# Altium PCB PCB1.PcbDoc (part 2 of 2)
Units mil, origin at the board's own origin, x right, y up, seen from the top; angles counter-clockwise.
Board outline 3937.01 x 3937.01 mil, 2 copper layers (Top Layer, Bottom Layer); 170 components, 123 nets, 575 pads, 355 vias.
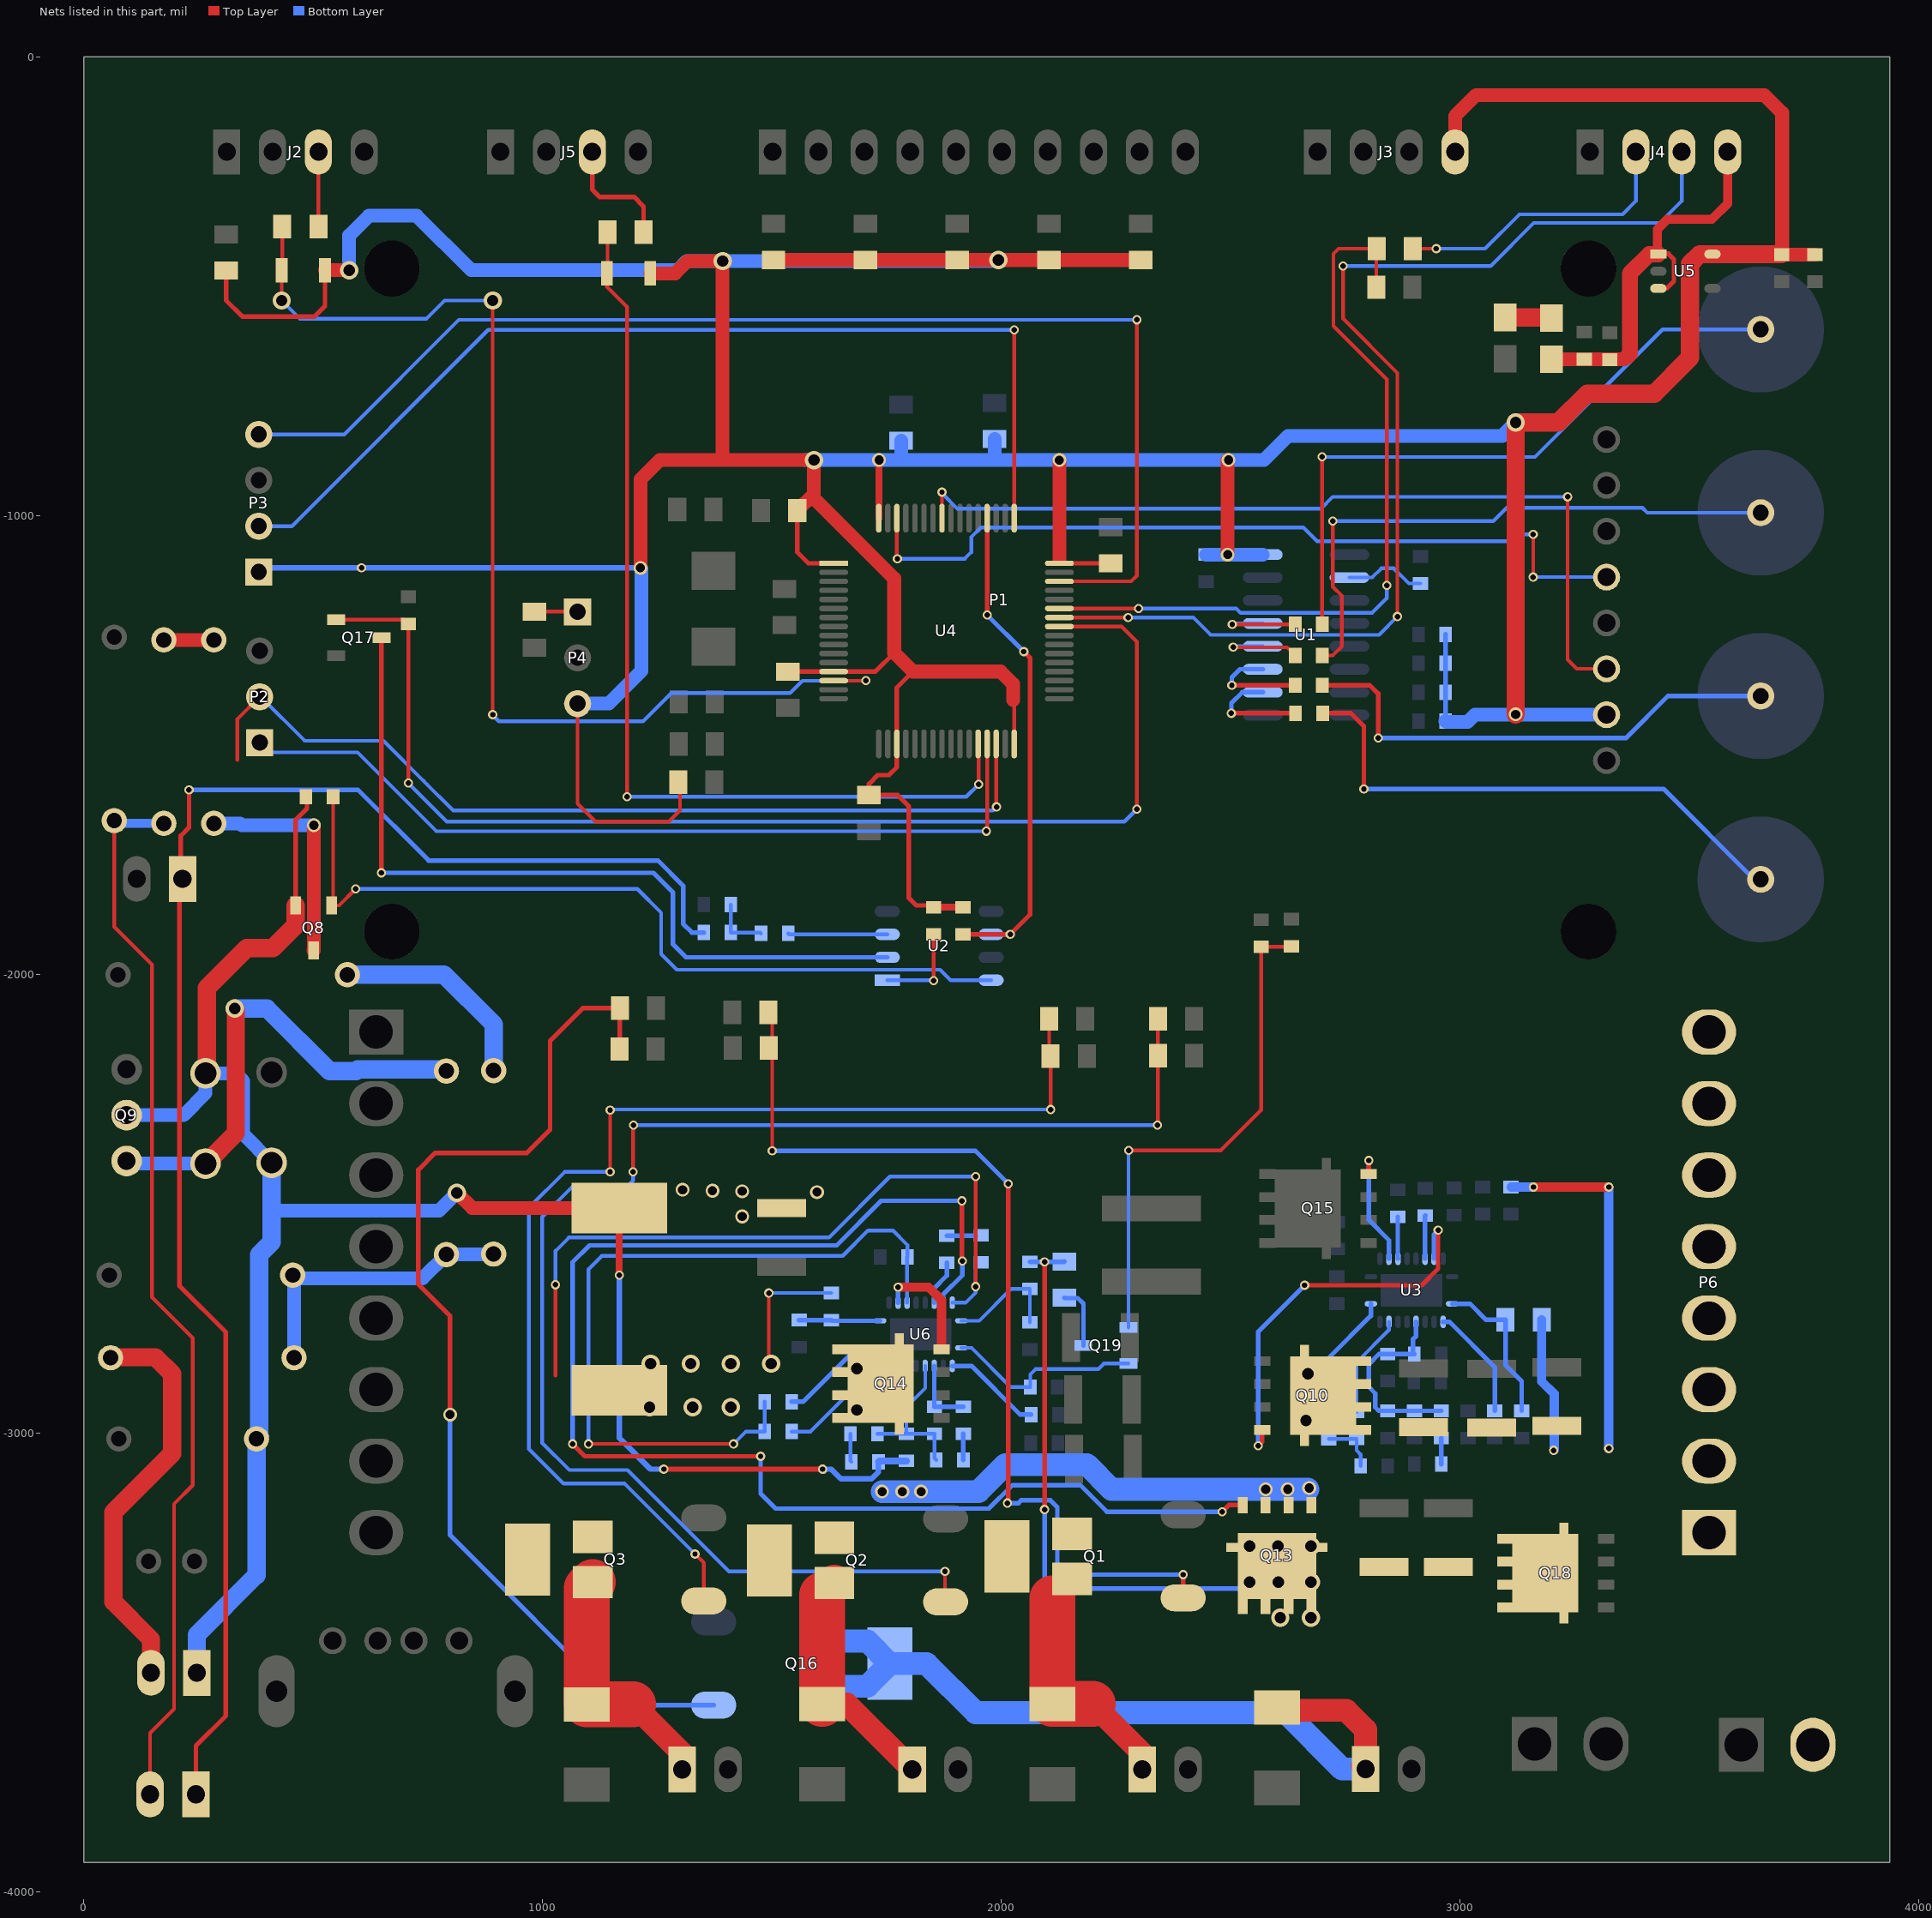
[diagram p2: the nets of this part, all layers, seen from the top]

## Via types
v1: diameter 30, hole 20, Top Layer to Bottom Layer, tented both sides, 158 vias
v2: diameter 20, hole 12, Top Layer to Bottom Layer, tented both sides, 143 vias
v3: diameter 40, hole 25, Top Layer to Bottom Layer, tented both sides, 54 vias

## Nets (pads, with @x,y where several pads share a name; then routed paths per layer and width w, separated by ;. In a path a pad name is that pad's centre, name@x,y a point inside that pad or via, vN(x,y) a via of type N, cw(c..) or ccw(c..) an arc to the next point about the centre after c; other vN are vias at no path point) (continued)
NetC23_1: C23.1 C46.1 R60.1 R61.1 | length 655.2
  Top Layer w30: C46.1@455.77,-2656 C46.1@462.69,-2662.91 ; R61.1@790.77,-2611 R61.1@791.77,-2610
  Bottom Layer w30: C23.1@455.77,-2833 C23.1@458.77,-2836 C46.1@458.77,-2659 ; C46.1@455.77,-2656 C46.1@458.77,-2659 ; R60.1@893.77,-2610 892.77,-2611 R61.1@790.77,-2611 738.86,-2662.91 462.69,-2662.91 C46.1@458.77,-2659
NetC23_2: C23.2 HUMID2.2 | length 888.3
  Top Layer w40: C23.2@58.77,-2836 59.77,-2835 156.77,-2835 192.77,-2871 192.77,-3045 64.77,-3173 64.77,-3368 146.77,-3450 HUMID2.2@146.77,-3523
NetC24_2: C24.2 Q9.1 R61.2 | length 1057.7
  Top Layer w40: C24.2@265.77,-2412.85 331.77,-2346.85 v3@331.77,-2077
  Bottom Layer w30: Q9.1@93.77,-2407 99.62,-2412.85 C24.2@265.77,-2412.85
  Bottom Layer w40: v3(329.77,-2075) 353,-2075 378.77,-2075 400,-2075 536,-2211 593.89,-2211 597.21,-2207.68 787.45,-2207.68 R61.2@790.77,-2211
NetC32_2: C32.2 C33.1 R29.1 R45.1 R48.2 U3.5 | length 429.2
  Bottom Layer w10: U3.5@2904.61,-2757.9 2904.61,-2789.16 2897.77,-2796 2897.77,-2825.06 C32.2@2900.72,-2828 R29.1@2842.77,-2828 2823.77,-2828 2801.77,-2850 2801.77,-2900 2815.77,-2914 2815.77,-2944 2823.77,-2952 2842.84,-2952 R45.1@2842.9,-2951.94 R48.2@2901.27,-2951.94 C33.1@2959.65,-2951.94
NetC33_2: C33.2 R49.2 | length 57.1
  Bottom Layer w10: C33.2@2959.65,-3011 2959.83,-3011.18 R49.2@2959.83,-3068
NetC34_1: C34.1 R42.2 R73.2 | length 122.9
  Bottom Layer w8: R42.2@2714.77,-3013.06 R73.2@2775,-3013.06 2775,-3038 2784,-3047 C34.1@2784,-3072
NetC35_2: C35.2 U1.2 | length 176.5
  Bottom Layer w8: U1.2@2759.49,-1135 2809,-1135 2829,-1115 2856,-1115 2889.06,-1148.06 C35.2@2914,-1148.06
NetC38_1: C38.1 R35.1 | length 63
  Bottom Layer w10: R35.1@1881.77,-2570 C38.1@1944.77,-2570
NetC38_2: C38.2 L5.1 Q13.1 Q13.2 Q13.3 Q14.5 Q14.6 Q14.7 Q14.8 R38.1 U6.19 | length 2865.1
  Top Layer w8: 1028.77,-2875 v2(1028.77,-2677) ; 1493.77,-2829 v2(1493.77,-2695) ; v2(1944.77,-2681) v2(1944.77,-2441)
  Bottom Layer w8: v2(1028.77,-2677) 1028.77,-2603 1057.77,-2574 1624.77,-2574 1757.77,-2441 v2(1944.77,-2441) ; v2(1493.77,-2695) R38.1@1629.77,-2695 ; U6.19@1893.67,-2716.1 1922.67,-2716.1 1944.77,-2694 v2(1944.77,-2681) C38.2@1944.77,-2629.06
  Bottom Layer w50: v1(1740.77,-3128) v1(1784.77,-3128) v1(1825.77,-3128) 1950.77,-3128 2009.77,-3069 2186.77,-3069 2240.77,-3123 v1(2576.77,-3123) v1(2624.77,-3123) v1@2668.77,-3123
  other v1: 2671.77,-3120
  other v3: 1685.77,-2950 1233.77,-2944 1327.77,-2944 1410.77,-2944 1685.77,-2860 1235.77,-2849 1323.44,-2849 1411.11,-2849 1498.77,-2849
NetC39_2: C39.2 R37.2 U6.20 | length 251.1
  Bottom Layer w8: U6.20@1913.35,-2755.47 1952.3,-2755.47 2021.72,-2686.06 R37.2@2062.77,-2686.06 C39.2@2062.77,-2758.94
NetC40_2: C40.2 R38.2 U6.11 | length 177.1
  Bottom Layer w10: C40.2@1559.77,-2753.94 1559.88,-2754.06 R38.2@1629.77,-2754.06 1631.19,-2755.47 U6.11@1736.19,-2755.47
NetC51_1: C51.1 C52.1 U6.4 | length 152.3
  Bottom Layer w10: U6.4@1854.3,-2853.9 1854.3,-2942.47 C52.1@1854.77,-2942.94 1917.72,-2942.94 C51.1@1917.77,-2943
NetC51_2: C51.2 R41.2 | length 56.9
  Bottom Layer w10: C51.2@1917.77,-3002.06 1917.77,-3058.89 R41.2@1917.83,-3058.94
NetC52_2: C52.2 C53.1 R41.1 R43.1 R44.2 U6.5 | length 347.6
  Bottom Layer w8: C53.1@1730.77,-3001.94 1730.83,-3001.89 R44.2@1793.77,-3001.89 ; U6.5@1834.61,-2853.9 1834.61,-2902.1 R43.1@1793.77,-2942.94 R44.2@1793.77,-3001.89 ; R41.1@1858.77,-3058.94 1854.77,-3054.94 C52.2@1854.77,-3002 1854.66,-3001.89 R44.2@1793.77,-3001.89
NetC53_2: C53.2 R46.2 | length 61.8
  Bottom Layer w8: C53.2@1671.72,-3001.94 1671.72,-3060.94 R46.2@1673.72,-3062.94
NetFB1_2: FB1.2 FU2.1 | length 101.4
  Top Layer w40: FB1.2@3099,-568 3199,-568 FU2.1@3200,-569
NetHUMID1_1: HUMID1.1 HUMID3.1 R57.2 | length 3570.4
  Top Layer w10: v2(229.77,-1598) 229.77,-1680 211.77,-1698 211.77,-1788 HUMID3.1@215.77,-1792 208.77,-1799 208.77,-2679 309.77,-2780 309.77,-3617 244.77,-3682 HUMID1.1@244.77,-3788
  Bottom Layer w10: v2(229.77,-1598) 598,-1598 752,-1752 1252,-1752 1307,-1807 1307,-1890 1326,-1909 R57.2@1351.94,-1909
NetHUMID1_2: HUMID1.2 R25.2 R26.2 | length 2343
  Top Layer w8: R26.2@66.77,-1665 66.77,-1896.77 149,-1979 149,-2704 238,-2793 238,-3114 197,-3155 197,-3602 144.77,-3654.23 HUMID1.2@144.77,-3788
  Bottom Layer w8: R26.2@66.77,-1665 R26.2@72.77,-1671
  Bottom Layer w20: R26.2@72.77,-1671 R25.2@174.77,-1671
NetJ2_3: J2.3 R2.1 | length 163
  Top Layer w8: R2.1@511.77,-370 J2.3@511.77,-207
NetJ5_3: J5.3 R4.1 | length 272.4
  Top Layer w8: R4.1@1215.77,-377 R4.1@1220.77,-382
  Top Layer w10: J5.3@1108.77,-207 1108.77,-289 1124.77,-305 1199.77,-305 1220.77,-326 R4.1@1220.77,-382
NetL2_1: L2.1 R60.2 | length 464.5
  Bottom Layer w40: L2.1@575,-2001 785.77,-2001 893.77,-2109 R60.2@893.77,-2210
NetP4_1: P4.1 R17.2 | length 94.3
  Top Layer w8: R17.2@982.77,-1209.26 1076.03,-1209.26 P4.1@1076.77,-1210
NetQ1_1: Q1.1 R1.2 R3.2 | length 2140.8
  Top Layer w8: R1.2@1492.51,-2067 1492.51,-2076 1501,-2084.49 1501,-2223.49 v2(1501,-2385) v2@1497.51,-2381.51
  Top Layer w10: v2@2015.77,-3151 v2(2015.77,-2457) ; Q1.1@2396.83,-3359.55 v2@2396.83,-3309.06
  Bottom Layer w10: v2(1501,-2385) 1943.77,-2385 v2(2015.77,-2457) ; v2(2013.77,-3153) 2037.77,-3153 2043.77,-3147 2107.77,-3147 2122.77,-3162 2122.77,-3286 2145.77,-3309 v2(2396.77,-3309)
NetQ2_1: Q2.1 R5.2 R6.2 | length 3282.1
  Top Layer w8: v2(1197.77,-2431) 1197.77,-2330 v2(1198.77,-2329) ; v2(1877.77,-3302) 1877.77,-3367.49 Q2.1@1878.83,-3368.55 ; v2@2342.03,-2327.97 R6.2@2342.03,-2177.74 ; R6.2@2342.03,-2177 R6.2@2342.03,-2177.74 ; R5.2@2342.03,-2097 2342.03,-2176.26 2341.29,-2177 R6.2@2342.03,-2177.74
  Bottom Layer w8: v2(1197.77,-2431) 1197.77,-2450 1183.77,-2464 1064.77,-2464 999.77,-2529 999.77,-3022 1058.77,-3081 1185.77,-3081 1406.77,-3302 v2(1877.77,-3302) ; v2(1198.77,-2329) v2(2341,-2329) v2@2342,-2328
NetQ3_1: Q3.1 R10.2 R11.2 | length 2597.5
  Top Layer w8: v2(1147.77,-2431) v2(1147.77,-2296) ; v2(1332.77,-3264) 1351.83,-3283.06 Q3.1@1351.83,-3366.55 ; R10.2@2105.03,-2097 2105.03,-2175.74 R11.2@2108.03,-2178.74 v2(2108.03,-2294.97)
  Bottom Layer w8: v2(1147.77,-2431) 1048.77,-2431 970.77,-2509 970.77,-3035 1046.25,-3110.48 1179.25,-3110.48 v2(1332.77,-3264) ; v2(1147.77,-2296) 1148.77,-2295 v2@2108,-2295
NetQ8_1: Q8.1 R63.1 U2.8 | length 1830.9
  Top Layer w8: 543.77,-1652 543.77,-1657 ; R63.1@543.77,-1613 543.77,-1657 ; v2(593,-1814) 557,-1850 Q8.1@540.77,-1850 543.77,-1847 543.77,-1657
  Bottom Layer w8: v2(593,-1814) 1207,-1814 1259,-1866 1259,-1956 1293,-1990 1867,-1990 1890,-2013 U2.8@1978.38,-2013
NetQ8_3: Q8.3 R24.2 | length 499.2
  Top Layer w30: Q8.3@501.4,-1948.43 502.03,-1947.8 502.03,-1816.26 v1(502.03,-1675.03)
  Bottom Layer w30: R24.2@287.77,-1675 R24.2@283.77,-1671 341,-1671 345.03,-1675.03 v1(502.03,-1675.03)
NetQ10_4: Q10.4 U3.18 | length 873.2
  Top Layer w10: v2(2560.77,-3028) 2569.17,-3019.6 Q10.4@2569.17,-2993.38 ; v2(2661.77,-2678) 2916.77,-2678 2952.77,-2642 v2(2952.77,-2558)
  Bottom Layer w10: v2(2560.77,-3028) 2560.77,-2779 v2(2661.77,-2678) ; U3.18@2943.98,-2620.1 2943.98,-2566.79
NetQ13_4: Q13.4 U6.18 | length 3157.9
  Top Layer w10: v2(1065.77,-3024) 1092.77,-3051 v2(1475.77,-3051) ; v2@1914.77,-2625 v2(1914.77,-2494) ; v2(2481.77,-3172) 2496.65,-3157.13 Q13.4@2526.56,-3157.13
  Bottom Layer w10: v2(1065.77,-3024) 1065.77,-2628 1102.77,-2591 1641.77,-2591 1738.77,-2494 v2(1914.77,-2494) ; v2(1475.77,-3051) 1475.77,-3132 1508.77,-3165 1973.49,-3165 2024.49,-3114 2172.77,-3114 2230.77,-3172 v2(2481.77,-3172) ; U6.18@1873.98,-2716.1 1873.98,-2697.79 1915.77,-2656 v2(1915.77,-2625)
NetQ14_4: Q14.4 U6.13 | length 247.7
  Top Layer w20: v2(1775.77,-2682) 1841.77,-2682 1870.37,-2710.6 Q14.4@1870.37,-2817.62
  Bottom Layer w10: U6.13@1775.56,-2716.1 1775.56,-2682.21 v2(1775.77,-2682)
NetQ15_4: Q15.4 U3.13 | length 262
  Top Layer w10: Q15.4@2801.37,-2435.62 2801.77,-2435.22 v2(2801.77,-2406)
  Bottom Layer w10: v2(2801.77,-2406) 2801.77,-2536 2845.56,-2579.79 U3.13@2845.56,-2620.1
NetQ16_1: Q16.1 R52.2 R53.2 | length 2342
  Top Layer w10: v1(798.77,-2960) 798.77,-2745 729.77,-2676 729.77,-2426.23 766.5,-2389.5 966.5,-2389.5 1017,-2339 1017,-2145 1088,-2074 R52.2@1169.03,-2074 1169.03,-2162 R53.2@1168.03,-2163
  Bottom Layer w10: v1(798.77,-2960) 798.77,-3223 1169.32,-3593.55 Q16.1@1373.71,-3593.55
NetQ17_3: Q17.3 U2.2 | length 1758.6
  Top Layer w10: Q17.3@648.77,-1265.94 Q17.3@649.2,-1266.37 v2(649.2,-1778.8) v2@649,-1779
  Bottom Layer w10: v2(649.2,-1778.8) 1241.8,-1778.8 1285,-1822 1285,-1935 1313,-1963 U2.2@1752,-1963
NetQ19_1: Q19.1 R71.2 R72.1 | length 1133.8
  Top Layer w8: v2(2278,-2384) 2479,-2384 2567,-2296 R71.2@2567,-1940.06 2631.94,-1940.06 R72.1@2633,-1939
  Bottom Layer w8: Q19.1@2278,-2770 v2(2278,-2384)
NetQ19_2: Q19.2 R34.2 U6.1 | length 437.5
  Bottom Layer w8: U6.1@1913.35,-2814.53 1935.53,-2814.53 2021,-2900 R34.2@2063.72,-2900 2063.72,-2872.28 2075,-2861 2212,-2861 2224.26,-2848.74 Q19.2@2278,-2848.74
NetQ19_3: Q19.3 R36.1 | length 138.2
  Bottom Layer w10: R36.1@2137.77,-2705 2138.77,-2706 2167,-2706 2179.57,-2718.57 Q19.3@2179.57,-2809.37
NetR19_2: R19.2 U3.17 | length 94.2
  Bottom Layer w10: U3.17@2924.3,-2620.1 2924.3,-2526.53 R19.2@2924.77,-2526.06
NetR20_1: R20.1 R51.2 U3.1 | length 344.1
  Bottom Layer w10: U3.1@2983.35,-2718.53 3022.3,-2718.53 3056.77,-2753 R20.1@3099.77,-2753 3099.77,-2852 3134.77,-2887 R51.2@3134.77,-2951.94
NetR23_1: R23.1 U2.1 | length 202.4
  Top Layer w8: v2(1853,-2014) R23.1@1853,-1913
  Bottom Layer w8: U2.1@1752,-2013 1852,-2013 v2(1853,-2014)
NetR24_1: R24.1 R25.1 | length 109
  Top Layer w30: R25.1@174.77,-1271 R24.1@283.77,-1271
NetR35_2: R35.2 U6.17 | length 98.4
  Bottom Layer w10: U6.17@1854.3,-2716.1 1854.3,-2684.47 1881.77,-2657 R35.2@1881.77,-2629.06
NetR39_1: R39.1 U6.10 | length 242.1
  Bottom Layer w10: R39.1@1544.77,-2932 R39.1@1543.77,-2932 1568.3,-2932 1685.77,-2814.53 U6.10@1736.19,-2814.53
NetR40_1: R40.1 U6.8 | length 304.7
  Bottom Layer w8: R40.1@1543.77,-2997 1584.77,-2997 1680.77,-2901 1751.77,-2901 1775.56,-2877.21 U6.8@1775.56,-2853.9
NetR42_1: R42.1 U3.10 | length 273.3
  Bottom Layer w10: R42.1@2714.77,-2954 2714.77,-2836 2806.19,-2744.58 U3.10@2806.19,-2718.53
NetR47_2: R47.2 U6.2 | length 216
  Bottom Layer w10: U6.2@1893.67,-2853.9 1935.67,-2853.9 2041.77,-2960 R47.2@2065.72,-2960
NetR50_2: R50.2 U3.2 | length 248.9
  Bottom Layer w10: U3.2@2963.67,-2757.9 2977.67,-2757.9 3076.4,-2856.62 R50.2@3076.4,-2951.94
NetR55_2: R55.2 R56.2 U4.43 | length 1713.5
  Top Layer w8: U4.43@2127.13,-1202.43 v2(2300,-1202.43) ; R55.2@2818.03,-502 2818.03,-419 R56.2@2819.03,-418 2735.77,-418 2724.77,-429 2724.77,-586.77 2841,-703 v2(2841,-1152)
  Bottom Layer w8: v2(2300,-1202.43) 2512.43,-1202.43 2522,-1212 2809,-1212 2841,-1180 v2(2841,-1152)
NetR57_1: R57.1 R62.2 R69.2 | length 127.8
  Bottom Layer w8: R62.2@1411.06,-1848 1411.06,-1908.94 R57.1@1411,-1909 1474.94,-1909 R69.2@1476.94,-1911
NetR65_1: R65.1 T1.1 | length 1451.3
  Top Layer w8: 2700,-919 2700,-934 ; v2(2700,-872) 2700,-934 ; R65.1@2700.43,-1237 2700,-1236.57 2700,-934
  Bottom Layer w8: v2(2700,-872) 3164,-872 3442,-594 T1.1@3656,-594
NetR65_2: R65.2 U1.13 | length 204.7
  Top Layer w8: v2(2504,-1237) R65.2@2641.38,-1237
  Bottom Layer w8: v2(2504,-1237) 2506,-1235 U1.13@2570.51,-1235
NetR66_1: R66.1 T2.1 | length 1281.6
  Top Layer w8: R66.1@2700.43,-1305 2723,-1305 2743,-1285 2743,-1175 2723,-1155 v2(2723,-1012)
  Bottom Layer w8: v2(2723,-1012) 3073,-1012 3102,-983 3398,-983 3408.67,-993.67 T2.1@3656,-993.67
NetR66_2: R66.2 U1.12 | length 208.2
  Top Layer w8: v2(2506,-1287) 2623.38,-1287 R66.2@2641.38,-1305
  Bottom Layer w8: v2(2506,-1287) 2508,-1285 U1.12@2570.51,-1285
NetR67_1: R67.1 T3.1 | length 1098
  Top Layer w10: R67.1@2700.43,-1370 2804,-1370 2822,-1388 v2(2822,-1485)
  Bottom Layer w10: v2(2822,-1485) 3362.33,-1485 3454,-1393.33 T3.1@3656,-1393.33
NetR67_2: R67.2 U1.11 | length 230.3
  Top Layer w10: v2(2503,-1370) R67.2@2641.38,-1370
  Bottom Layer w10: v2(2503,-1370) 2503,-1353 2521,-1335 U1.11@2570.51,-1335
NetR68_1: R68.1 T4.1 | length 1185.2
  Top Layer w10: R68.1@2701,-1431 2763,-1431 2791,-1459 v2(2791,-1596)
  Bottom Layer w10: v2(2791,-1596) 3444,-1596 3641,-1793 T4.1@3656,-1793
NetR68_2: R68.2 U1.10 | length 240.4
  Top Layer w10: v2(2502,-1431) R68.2@2641.94,-1431
  Bottom Layer w10: v2(2502,-1431) 2502,-1409 2526,-1385 U1.10@2570.51,-1385
NetR69_1: R69.1 U2.3 | length 216.8
  Bottom Layer w8: R69.1@1536,-1911 1538,-1913 U2.3@1752,-1913
NetR73_1: R73.1 U3.8 | length 225.3
  Bottom Layer w8: R73.1@2775,-2954 2775,-2846 2845.56,-2775.44 U3.8@2845.56,-2757.9
OUT1: D1.A J1.1 Q1.2 | length 505.1
  Top Layer w50: 2199.87,-3591 2307.77,-3698.91 J1.1@2307.77,-3733.5
  Top Layer w100: 2111.74,-3361.18 D1.A@2111.74,-3591 2199.87,-3591
OUT2: D4.A J6.1 Q2.2 | length 529.8
  Top Layer w50: D4.A@1610.26,-3591 1663.77,-3591 J6.1@1806.27,-3733.5
  Top Layer w80: Q2.2@1610.26,-3353.66 Q2.2@1636.71,-3327.21
  Top Layer w100: D4.A@1610.26,-3591 Q2.2@1610.26,-3353.66
OUT3: D5.A J7.1 Q3.2 | length 559
  Top Layer w50: 1197.87,-3592 1304.77,-3698.91 J7.1@1304.77,-3733.5
  Top Layer w100: Q3.2@1109.71,-3325.21 1096.77,-3338.15 D5.A@1096.77,-3592 1197.87,-3592
OUT4: D6.A J9.1 Q16.2 | length 1769.7
  Top Layer w50: D6.A@2601.77,-3599 2607.77,-3605 2752.77,-3605 2794.77,-3647 J9.1@2794.77,-3733 J9.1@2787.77,-3726
  Bottom Layer w50: Q16.2@1615.84,-3552.21 1708.36,-3552.21 Q16.2@1757.57,-3503 ; Q16.2@1615.83,-3453.79 1708.36,-3453.79 Q16.2@1757.57,-3503 ; J9.1@2797.77,-3730 J9.1@2794.77,-3733 2743.77,-3733 2620.77,-3610 1944.77,-3610 1837.77,-3503 Q16.2@1757.57,-3503
PWM: Q17.1 R54.2 U4.41 | length 2677
  Top Layer w8: Q17.1@550.77,-1227 R54.2@698.94,-1227 ; v2(707.77,-1583) 707.77,-1330 708,-1329.77 R54.2@708,-1236.06 ; U4.41@2127.13,-1241.8 2262.8,-1241.8 2296,-1275 v2(2296,-1640)
  Bottom Layer w8: v2(707.77,-1583) 791.77,-1667 2269,-1667 v2(2296,-1640)
RES: P1.5 U4.62 | length 1794.1
  Top Layer w8: U4.62@1772.8,-1005.57 1772.8,-1092.8 v2(1774,-1094) ; v2(3160,-1134) v2(3160,-1041)
  Bottom Layer w8: v2(1774,-1094) 1921,-1094 1935,-1080 1935,-1047 1956,-1026 2659,-1026 2689,-1056 3111,-1056 3126,-1041 v2(3160,-1041) ; v2(3160,-1134) P1.5@3320,-1134
RX: J4.2 R56.1 | length 635.2
  Top Layer w8: R56.1@2897.77,-418 v2@2947.77,-418
  Bottom Layer w8: v2(2948.77,-418) 3055,-418 3130,-343 3355,-343 3383.77,-314.23 J4.2@3383.77,-207
RX3: P2.2 U4.30 | length 2019.2
  Top Layer w8: 335.24,-1532.4 335.24,-1443.53 P2.2@383.77,-1395 ; U4.30@1989.33,-1497.7 1989.33,-1634.33 v2(1990,-1635)
  Bottom Layer w8: P2.2@383.77,-1395 386,-1395 482,-1491 653.77,-1491 741.39,-1578.61 ; 749.77,-1587 741.39,-1578.61 ; v2(1990,-1635) 1982,-1643 805.77,-1643 741.39,-1578.61
SCK: P1.3 U4.57 | length 1898.1
  Top Layer w8: U4.57@1871.22,-1005.57 v2(1871.22,-948.78) v2@1871.22,-946.78 ; v2(3235,-959) 3235,-1314 3255,-1334 P1.3@3320,-1334
  Bottom Layer w8: v2(1871.22,-948.78) 1871.22,-951.22 1905,-985 2697,-985 2723,-959 v2(3235,-959)
SW1: D2.A R2.2 U4.14 | length 2483.4
  Top Layer w8: v3(431.77,-531) D2.A@431.77,-465 433.03,-463.74 R2.2@433.03,-370 ; v2(891.77,-1434) v3(891.77,-531) ; U4.14@1635,-1359.91 v2(1705.09,-1359.91)
  Bottom Layer w8: v3(431.77,-531) 471.77,-571 747,-571 787,-531 v3(891.77,-531) ; v2@891.77,-1435 905.3,-1448.53 1219.47,-1448.53 1281,-1387 1540,-1387 1567.09,-1359.91 v2(1705.09,-1359.91)
SW2: D3.A R4.2 U4.28 | length 2115.9
  Top Layer w8: R4.2@1142.03,-382 1142.03,-470.74 D3.A@1140.77,-472 1140.77,-501 1184.77,-545 v2(1184.77,-1613) ; U4.28@1949.96,-1497.7 1951,-1498.74 v2(1951,-1586)
  Bottom Layer w8: v2(1184.77,-1613) 1712,-1613 1924,-1613 v2(1951,-1586)
SWCLK: P3.2 U4.49 | length 2235.2
  Top Layer w8: U4.49@2028.7,-1005.57 v2(2028.7,-595.3) v2@2029,-595
  Bottom Layer w8: P3.2@381.77,-1023 454,-1023 882,-595 v2@2029,-595
SWD: P3.4 U4.46 | length 2749.8
  Top Layer w8: U4.46@2127.13,-1143.37 2283.63,-1143.37 2296,-1131 v2(2296,-573)
  Bottom Layer w8: P3.4@381.77,-823 568,-823 818,-573 v2(2296,-573)
TX: J4.3 U4.42 | length 2486.2
  Top Layer w8: U4.42@2127.13,-1222.11 2276.89,-1222.11 v2(2277,-1222) ; v2(2745.77,-456) 2745.77,-570.77 2864,-689 v2(2864,-1220)
  Bottom Layer w8: v2(2277,-1222) 2419,-1222 2457,-1260 2824,-1260 v2(2864,-1220) ; v2(2745.77,-456) 3067,-456 3161,-362 3436,-362 3483.77,-314.23 J4.3@3483.77,-207
TX3: P2.1 U4.29 | length 1855.4
  Top Layer w8: v2(1968,-1688) 1970,-1686 1970,-1498.06 U4.29@1969.65,-1497.7
  Bottom Layer w8: P2.1@383.77,-1495 404.77,-1516 597,-1516 769,-1688 v2(1968,-1688)
VCC: C27.2 C28.1 FU2.2 J4.4 U5.1 U5.3 | length 888.9
  Top Layer w10: U5.3@3432.77,-504.8 3450.77,-504.8 3466.77,-488.8 3466.77,-441 3454.77,-429 U5.1@3445.21,-429
  Top Layer w20: U5.1@3432.77,-430 3430.77,-428 3430.77,-376 3452.77,-354 3549.42,-354 3583.77,-319.65 J4.4@3583.77,-207
  Top Layer w30: FU2.2@3200,-659 C28.1@3271,-659 3327,-659 3331,-659 3359,-659 3366,-652
  Top Layer w35: 3366,-652 3371,-647 3371,-472 3413,-430 U5.1@3432.77,-430
VCC_3.3V: C4.2 C5.2 C6.2 C7.2 C25.1 C26.2 C36.1 D2.K D3.K J3.4 P1.2 P3.1 P4.3 R7.2 R8.2 R9.2 R12.1 R13.1 R15.1 R16.1 R18.1 R22.2 R23.2 R28.1 R58.2 R59.1 R64.1 R70.2 U1.16 U4.1 U4.13 U4.19 U4.32 U4.48 U4.64 U5.5 | length 13578.6
  Top Layer w8: P4.3@1076.77,-1410 1076.77,-1627.77 1116,-1667 1276,-1667 1300,-1643 1300,-1585 R15.1@1296,-1581 ; 2026,-1402 2028.7,-1404.7 U4.32@2028.7,-1497.7
  Top Layer w10: R22.2@310.77,-465.74 310.77,-531 345.77,-566 503.77,-566 526.26,-543.51 D2.K@526.26,-465 ; C4.2@1535,-1340.26 1535.04,-1340.22 U4.13@1635,-1340.22 1635.31,-1339.91 1726.09,-1339.91 1767,-1299 ; C5.2@1555.74,-989 1555.74,-1079.74 1580,-1104 U4.1@1635,-1104 ; 1808,-1340 1772.48,-1375.52 1772.48,-1497.39 U4.19@1772.8,-1497.7 1772.8,-1548.46 1755.51,-1565.75 1731.25,-1565.75 1712,-1585 C6.2@1712,-1609.26 1774.26,-1609.26 1799,-1634 1799,-1834 1815,-1850 1849.06,-1850 R23.2@1853,-1853.94 ; v1@2127,-878.85 v1(2127.13,-878.98) ; 2127.13,-1095 U4.48@2127.13,-1104 2238.74,-1104 C7.2@2239,-1103.74
  Top Layer w15: U4.64@1733.43,-1005.57 1733.43,-879.42 v1(1734,-878.85) ; R23.2@1853,-1853.94 R70.2@1917,-1853.94
  Top Layer w30: D2.K@526.26,-465 v3(578.77,-465) ; v1(1213.77,-1114) 1213.77,-921.23 1256.15,-878.85 v3@1591,-878.85 ; D3.K@1235.26,-472 1289.77,-472 1316.77,-445 v3(1392.77,-445) 1392.77,-875 ; R9.2@1503.77,-442.74 R8.2@1704.02,-442.74 R7.2@1904.27,-442.74 v3(1993.77,-442.74) R59.1@2104.52,-442.74 R58.2@2304.77,-442.74 ; C5.2@1555.74,-989 1592,-952.74 ; v3(1592,-878.85) 1592,-952.74 ; 2026,-1402 2026,-1367 1999,-1340 1808,-1340 1767,-1299 1767,-1137 1592,-962 1592,-952.74 ; 2127.13,-1095 v1(2127.13,-878.98) ; v1(2494,-1085) v1@2494,-878.85 ; J3.4@2989.77,-207 2989.77,-129 3035.77,-83 3663.77,-83 3702.77,-122 3702.77,-429.94 C26.2@3701.77,-430.94 C36.1@3774,-430.94
  Top Layer w40: v1(3121.77,-1433.23) v3(3121.77,-797) 3215,-797 3278,-734 3424,-734 3502,-656 3502,-451 3523,-430 U5.5@3550.88,-430 C26.2@3700.83,-430
  Bottom Layer w10: R28.1@2969,-1448 R16.1@2969,-1385 R18.1@2969,-1322 R64.1@2969,-1259
  Bottom Layer w12: P3.1@381.77,-1123 390.77,-1114 v2(605.77,-1114) v1(1213.77,-1114) ; P4.3@1071.77,-1405 P4.3@1076.77,-1410
  Bottom Layer w30: v3(578.77,-465) 578.77,-389.23 622,-346 726,-346 845,-465 1294.77,-465 1314.77,-445 v3(1392.77,-445) v3@1977.77,-445 ; P4.3@1076.77,-1410 1144.77,-1410 1215.77,-1339 v1@1215.77,-1116 ; v3@1572.42,-878.85 v3(1592,-878.85) v1(1734,-878.85) v1(2496,-878.85) 2573,-878.85 2625.85,-826 3092.77,-826 v3(3121.77,-797) ; 1782,-875.85 R13.1@1782,-837 ; 1986,-875.85 R12.1@1986,-833 ; C25.1@2447,-1085 v1(2494,-1085) U1.16@2570.51,-1085 ; R28.1@2969,-1448 2971,-1450 3016.77,-1450 3032.77,-1434 P1.2@3320,-1434
VCC_12_24: J13.2 P6.5 P6.6 P6.7 P6.8
VCC_24V: C16.2 C17.2 C24.1 C41.1 HUMID2.1 L5.2 Q8.2 Q9.2 R44.1 R46.1 R63.2 | length 4463.7
  Top Layer w10: Q8.2@462.03,-1850 462.03,-1663.97 487,-1639 487,-1615.28 R63.2@484.72,-1613
  Top Layer w12: v2(1264.77,-3079) v2(1610.77,-3079)
  Top Layer w15: v2(1167.77,-2656) L5.2@1167.77,-2509.36
  Top Layer w30: v3(813.77,-2476.3) 846.83,-2509.36 L5.2@1167.77,-2509.36
  Top Layer w40: C24.1@265.77,-2216 268.77,-2213 268.77,-2090 ; 268.77,-2064 268.77,-2090 ; Q8.2@462.03,-1850 462.03,-1893.39 412.42,-1943 355.77,-1943 268.77,-2030 268.77,-2090
  Bottom Layer w12: v2(1167.77,-2656) 1167.77,-3011 1174.77,-3018 1180.77,-3024 1235.77,-3079 v2(1264.77,-3079) ; v2@1614.77,-3083 v2(1610.77,-3079) 1629.77,-3079 1650.77,-3100 1717.77,-3100 1732.77,-3085 R46.1@1732.77,-3062.94
  Bottom Layer w15: R46.1@1732.77,-3062.94 1734.77,-3060.94 R44.1@1793.77,-3060.94
  Bottom Layer w30: Q9.2@93.77,-2307 217.77,-2307 265.77,-2259 C24.1@265.77,-2216 ; C24.1@259.77,-2222 C24.1@265.77,-2216 ; 409.77,-2503 421.77,-2515 775.07,-2515 v3(813.77,-2476.3) ; C16.2@409.77,-2410.85 347.77,-2348.85 347.77,-2233 330.77,-2216 C24.1@265.77,-2216
  Bottom Layer w40: HUMID2.1@246.77,-3523 246.77,-3440 376.77,-3310 C17.2@376.77,-3013 C17.2@382.77,-3007 ; C17.2@383.77,-3006 C17.2@382.77,-3007 ; C16.2@409.77,-2410.85 409.77,-2503 409.77,-2584 382.77,-2611 C17.2@382.77,-3007
  other v1: 1435.77,-2528 1598.77,-2475 1435.77,-2473 1370.77,-2471.96 1305.77,-2470
VCC_L: C50.1 R39.2 R40.2 U6.14 | length 1710.4
  Top Layer w8: v2(1100.77,-3024) v2(1416.77,-3024)
  Bottom Layer w8: v2(1100.77,-3024) 1100.77,-2643 1129.77,-2614 1654.77,-2614 1709.77,-2559 1764.77,-2559 1795.77,-2590 C50.1@1795.77,-2616 ; v2(1416.77,-3024) 1443.77,-2997 R40.2@1484.72,-2997 R39.2@1484.72,-2932 ; 1794.51,-2651.73 1795.24,-2651 ; U6.14@1795.24,-2716.1 1795.24,-2651 ; C50.1@1795.24,-2616.53 1795.24,-2651
VCC_L2: C13.1 U3.14 | length 91.3
  Bottom Layer w10: C13.1@2864.77,-2529 2864.77,-2619.63 U3.14@2865.24,-2620.1
VIN: C9.1 C10.1 C11.1 C19.1 C20.1 P6.1 P6.2 P6.3 P6.4 Q10.5 Q10.6 Q10.7 Q10.8 Q13.5 Q13.6 Q13.7 Q13.8 Q18.5 Q18.6 Q18.7 Q18.8 R20.2 R21.1 R36.2 R37.1 | length 2306.7
  Top Layer w10: v2(2094.77,-3167) v2(2094.77,-2627)
  Top Layer w20: v2(3160.77,-2464) v2(3324.77,-2464)
  Bottom Layer w10: R37.1@2062.77,-2627 v2(2094.77,-2627) 2137.03,-2627 R36.2@2137.77,-2626.26 ; v2(2094.77,-3167) 2094.77,-3317.29 2116.77,-3339.29 2527.49,-3339.29 v3(2541.77,-3325) ; R36.2@2137.03,-2626 R36.2@2137.77,-2626
  Bottom Layer w20: R21.1@3111.77,-2464 v2(3160.77,-2464) ; R20.2@3178.51,-2753 3178.51,-2887.74 3205.77,-2915 v2@3205.77,-3037 ; v2(3324.77,-3034) v2(3324.77,-2464)
  other v2: 3204.77,-3038
  other v3: 2608.77,-3403 2675.77,-3403 2604.77,-3325 2675.77,-3325 2541.77,-3247 2603.27,-3247 2675.77,-3247 2664.77,-2973 2668.77,-2871
WATER_ADC: R70.1 U2.6 U4.52 | length 1109
  Top Layer w10: R70.1@1917,-1913 v2(2020,-1913) 2063,-1870 2063,-1310 v2(2049.6,-1296.6) ; U4.52@1969.65,-1005.57 v2(1969.65,-1216.65) v2@1970,-1217
  Bottom Layer w10: v2(1969.65,-1216.65) v2(2049.6,-1296.6) ; U2.6@1978.38,-1913 v2(2020,-1913)
pads on no net: J5.1 P1.9 P2.3 T1. T2. T3. T4. U1.3 U1.4 U1.9 U3.7 U4.10 U4.11 U4.25 U4.37 U4.38 U4.39 U4.40 U4.44 U4.45 U4.50 U4.51 U4.54 U6.7 USB1.2 USB1.3 USB1.6

## Polygon pours and split planes (outlines as drawn)
GND on Top Layer "Top Layer-No Net" (solid, remove dead copper, pour order 1001): -195.65,105.64 3960.35,105.64 3994.35,139.64 4056.35,77.64 4056.35,-3933.36 4043.35,-3933.36 3905.35,-4071.36 3877.35,-4043.36 -126.65,-4043.36 -126.65,-3756.36 -250.65,-3632.36 -92.65,-3474.36 -92.65,146.64
+5V on Top Layer "Top Layer-No Net" (solid, remove dead copper, pour order 1000): 513.78,-2041.89 705.77,-2041.89 716.66,-2041.89 722.28,-2047.51 733.77,-2059 733.77,-2230 733.77,-2322 719.77,-2336 711.77,-2344 611.77,-2344 554.77,-2344 548.77,-2350 546.77,-2352 546.77,-2386 546.77,-3361 553.77,-3368 569.77,-3368 579.77,-3368 583.77,-3372 590.77,-3379 590.77,-3404 590.77,-3484 575.77,-3499 573.77,-3501 523.77,-3501 492.77,-3501 473.77,-3482 389.77,-3398 389.77,-2080 389.77,-2078 409.77,-2058 425.88,-2041.89 513.78,-2041.89
GND on Bottom Layer "Top Layer-No Net" (solid, remove dead copper, pour order 1002): -232.58,68.3 3923.42,68.3 3957.42,102.3 4019.42,40.3 4019.42,-3970.7 4006.42,-3970.7 3868.42,-4108.7 3840.42,-4080.7 -163.58,-4080.7 -163.58,-3793.7 -287.58,-3669.7 -129.58,-3511.7 -129.58,109.3

## Keep-outs
Keep-Out Layer:
  the board outline again, w10

## Other copper
Top Layer:
  rectangle net GND: 3123.77,-3823 3196.77,-3524
  rectangle net GND: 3045.77,-3699 3234.77,-3647
  rectangle net GND: 3601.77,-3783 3641.77,-3597
  rectangle net GND: 3533.77,-3704 3635.77,-3655
  rectangle net GND: 3278.11,-3244 3401.77,-3191.29
  rectangle net GND: 2865.07,-2901 3307.77,-2796
  rectangle net GND: 2785.77,-2629 2859.77,-2476
  rectangle net GND: 2753.77,-3220.71 3037.48,-3146
  rectangle net GND: 2930.26,-3199.73 3037.48,-3112
  rectangle net GND: 2118.77,-3167.71 2204.77,-2736
  rectangle net GND: 2118.77,-2774 2182.77,-2685
  rectangle net GND: 1830.07,-2998 1938.77,-2858.62
  rectangle net GND: 2358.77,-3284.51 2464.48,-3191
  rectangle net VCC_12_24: 3677.77,-3921 3920.77,-2355
  rectangle net VCC_12_24: 3416.77,-2650 3918.77,-2028
  rectangle net OUT2: 1440.77,-3362 1681.77,-3188
  rectangle net OUT3: 911.77,-3354.93 1168.01,-3184
  rectangle net OUT1: 1964.77,-3356 2200.77,-3182
  pour cut-out: 3730.84,-1724.84 3743.84,-1737.84 3743.84,-1855.84 3730.84,-1868.84 3589.84,-1868.84 3564.84,-1843.84 3564.84,-1732.84 3572.84,-1724.84
  pour cut-out: 3729,-1325 3742,-1338 3742,-1456 3729,-1469 3588,-1469 3563,-1444 3563,-1333 3571,-1325
  pour cut-out: 3729,-922 3742,-935 3742,-1053 3729,-1066 3588,-1066 3563,-1041 3563,-930 3571,-922
  pour cut-out: 457.77,-2346 469.77,-2358 469.77,-2440 446.77,-2463 369.77,-2463 356.77,-2450 356.77,-2346
  region net VCC_24V: 1613.77,-2452 1620.77,-2459 1620.77,-2524 1596.77,-2548 1402.77,-2548 1372.77,-2578 1058.77,-2578 1042.77,-2562 1042.77,-2460 1050.77,-2452
  region net NetC38_2: 2555.77,-3178 2689.77,-3178 2694.77,-3173 2694.77,-3106 2691.77,-3103 2555.77,-3103
  region net +12V: 2437.77,-2626 2452.77,-2641 2452.77,-3113 2443.77,-3122 2304.77,-3122 2304.77,-3444 2513.77,-3653 2513.77,-3736 2492.77,-3757 2379.77,-3757 2361.77,-3739 2361.77,-3618 2228.77,-3485 2228.77,-2721 2201.77,-2721 2193.77,-2713 2193.77,-2631 2198.77,-2626
  region net NetC21_2: 2598.77,-2964 2607.77,-2955 2607.77,-2646 2619.77,-2634 2743.77,-2634 2754.77,-2623 2754.77,-2396 2741.77,-2383 2545.77,-2383 2516.77,-2412 2207.77,-2412 2188.77,-2431 2188.77,-2537 2202.77,-2551 2471.77,-2551 2471.77,-2959 2476.77,-2964
  region net VIN: 3258.77,-3434 3258.77,-3184 3267.77,-3175 3427.77,-3175 3434.77,-3182 3434.77,-3295 3446.77,-3303 3626.77,-3303 3626.77,-2673 3387.77,-2673 3371.77,-2689 3371.77,-2901 3352.77,-2920 2854.77,-2920 2845.77,-2911 2845.77,-2809 2828.77,-2792 2637.77,-2792 2626.77,-2803 2626.77,-3043 2663.77,-3080 3048.77,-3080 3048.77,-3235 2749.77,-3235 2713.77,-3199 2493.77,-3199 2475.77,-3217 2475.77,-3434
  region net +48V: 3481.44,-3821 3481.77,-3658 3481.77,-3341 3412.77,-3341 3412.77,-3258 3275.77,-3258 3275.77,-3578 3249.77,-3604 3249.77,-3821
  region net NetC38_2: 1810.77,-2806 1810.77,-3010 1845.77,-3045 1845.77,-3152 1711.77,-3152 1711.77,-3008 1695.77,-2992 919.77,-2992 891.77,-2964 891.77,-2806
Bottom Layer:
  rectangle net GND: 3135.77,-3806 3187.77,-3554
  rectangle net GND: 3054.77,-3699 3234.77,-3635
  rectangle net GND: 3596.77,-3802 3636.77,-3582
  rectangle net GND: 3533.77,-3701 3624.77,-3655
  rectangle net VIN: 3447.77,-3289 3631.77,-2682
  rectangle net VCC_12_24: 3676.77,-3921 3922.77,-2609
  rectangle net VCC_12_24: 3422.77,-2650 3923.77,-2029
  pour cut-out: -4,-1726 162,-1726 162,-1981 182,-2001 429,-2001 518.35,-2090.35 518.35,-3266.65 333,-3452 333,-3932 328,-3937 322,-3931 -17,-3931 -17,-1739
  pour cut-out: 3473,-1345.62 3472.38,-1345 3415,-1345 3356,-1404 3356,-1451 3395,-1490 3395,-1491 3455,-1491 3473,-1473
  pour cut-out: 3473,-554.98 3413.02,-554.98 3113,-855 3113,-905 3461,-905 3475,-891 3473,-889
  pour cut-out: 2745,-1570 2745,-1612 2779,-1646 3461.69,-1646 3477.85,-1629.85 3472,-1624 3472,-1602 2778,-1602 2746,-1570
  pour cut-out: 3518,-374 3794,-374 3849,-429 3849,-1899 3778,-1970 3516,-1970 3473,-1927 3473,-419
  pour cut-out: 457.77,-2346 469.77,-2358 469.77,-2440 446.77,-2463 369.77,-2463 356.77,-2450 356.77,-2346
  region net +48V: 3481.44,-3821 3481.77,-3658 3481.77,-3341 3412.77,-3341 3412.77,-3340 3275.77,-3340 3275.77,-3578 3249.77,-3604 3249.77,-3821

## Silkscreen, mask and mechanical layers (free items; w line width, h text height)
Top Overlay:
  pour cut-out: 3743,-537 3756,-550 3756,-668 3743,-681 3602,-681 3577,-656 3577,-545 3585,-537
  text "串口" at 3373.77,69 h50
  text "目标温度、环境温度、水温、压缩机排气温度、目标送风温度" at 1394.77,32 h50
  text "iic湿度" at 2772.77,25 h50
  text "湿度" at 371.77,14 h50
  text "-  SW2" at 1011.77,-45 h50
  text "5V" at 1178.77,-47 h50
  text "A6     -     SW1    5V" at 270.77,-52 h50
  text "-     A1     -      A2     -     A3     -      A4    -      A5" at 1494.77,-52 h50
  text "-     RX    TX    5V" at 3251.77,-53 h50
  text "-     SCL  SDA   3.3V" at 2639.77,-57 h50
  text "SWD" at 453.83,-845.46 h50
  text "GND" at 455.77,-942 h50
  text "SWCLK" at 456.81,-1030.03 h50
  text "3.3V" at 454.77,-1137 h50
  text "GND" at 452.77,-1312 h50
  text "RX3" at 452.77,-1407 h50
  text "TX3" at 457.09,-1504.84 h50
  text "+ -" at 2919.77,-3843 h60 r180
  text "+ -" at 1933.77,-3858.1 h60 r180
  text "+ -" at 2442.77,-3868 h60 r180
  text "+ -" at 1433.77,-3871 h60 r180
  text "SW1 SW2" at 61.77,-3907 h40
  text "- 48V" at 3118.77,-3923 h50
  text "- 12V" at 3585.77,-3924 h50
  text "水泵" at 1327.77,-3999 h50
  text "冷风" at 1841.77,-4001 h50
  text "电磁阀" at 2784.77,-4001 h50
  text "水位开关2" at 92.77,-4002 h50
  text "热风" at 2333.77,-4008 h50
Bottom Overlay:
  text "OUT" at 988.77,-1211 h50
  text "GND" at 987.77,-1322 h50
  text "3.3V" at 995.77,-1438 h50
Top Solder:
  rectangle: 3681.77,-3796 3920.77,-2028.41
Bottom Solder:
  rectangle: 2557.77,-3853 2820.77,-3764
  rectangle: 2545.77,-3871 2662.77,-3604
  rectangle: 3503.77,-3867 3660.77,-3599
  rectangle: 2544.77,-3913 3659.77,-3838
  rectangle: 3678.77,-3808 3924.77,-2033
Mechanical 1:
  the board outline again, w10

## Text inside footprints (layer, text, board x,y; h text height)
Q1: Top Overlay "1" at 2249.2,-3347.74 h43.31 r90; Top Overlay "3" at 2249.2,-3211.91 h43.31 r90
Q2: Top Overlay "1" at 1731.2,-3356.74 h43.31 r90; Top Overlay "3" at 1731.2,-3220.91 h43.31 r90
Q3: Top Overlay "1" at 1204.2,-3354.74 h43.31 r90; Top Overlay "3" at 1204.2,-3218.91 h43.31 r90
Q16: Bottom Overlay "1" at 1521.35,-3581.74 h43.31 r270; Bottom Overlay "3" at 1521.35,-3445.91 h43.31 r270